# Altium PCB LASERDIODE_V1.2.0.PcbDoc (part 2 of 2)
Units mm, origin at the board's own origin, x right, y up, seen from the top; angles counter-clockwise.
Board outline 86 x 86 mm, 4 copper layers (Top Layer, Mid-Layer 1, Mid-Layer 2, Bottom Layer); 190 components, 97 nets, 948 pads, 583 vias.
Unrouted connection lines stored in the file: 478.
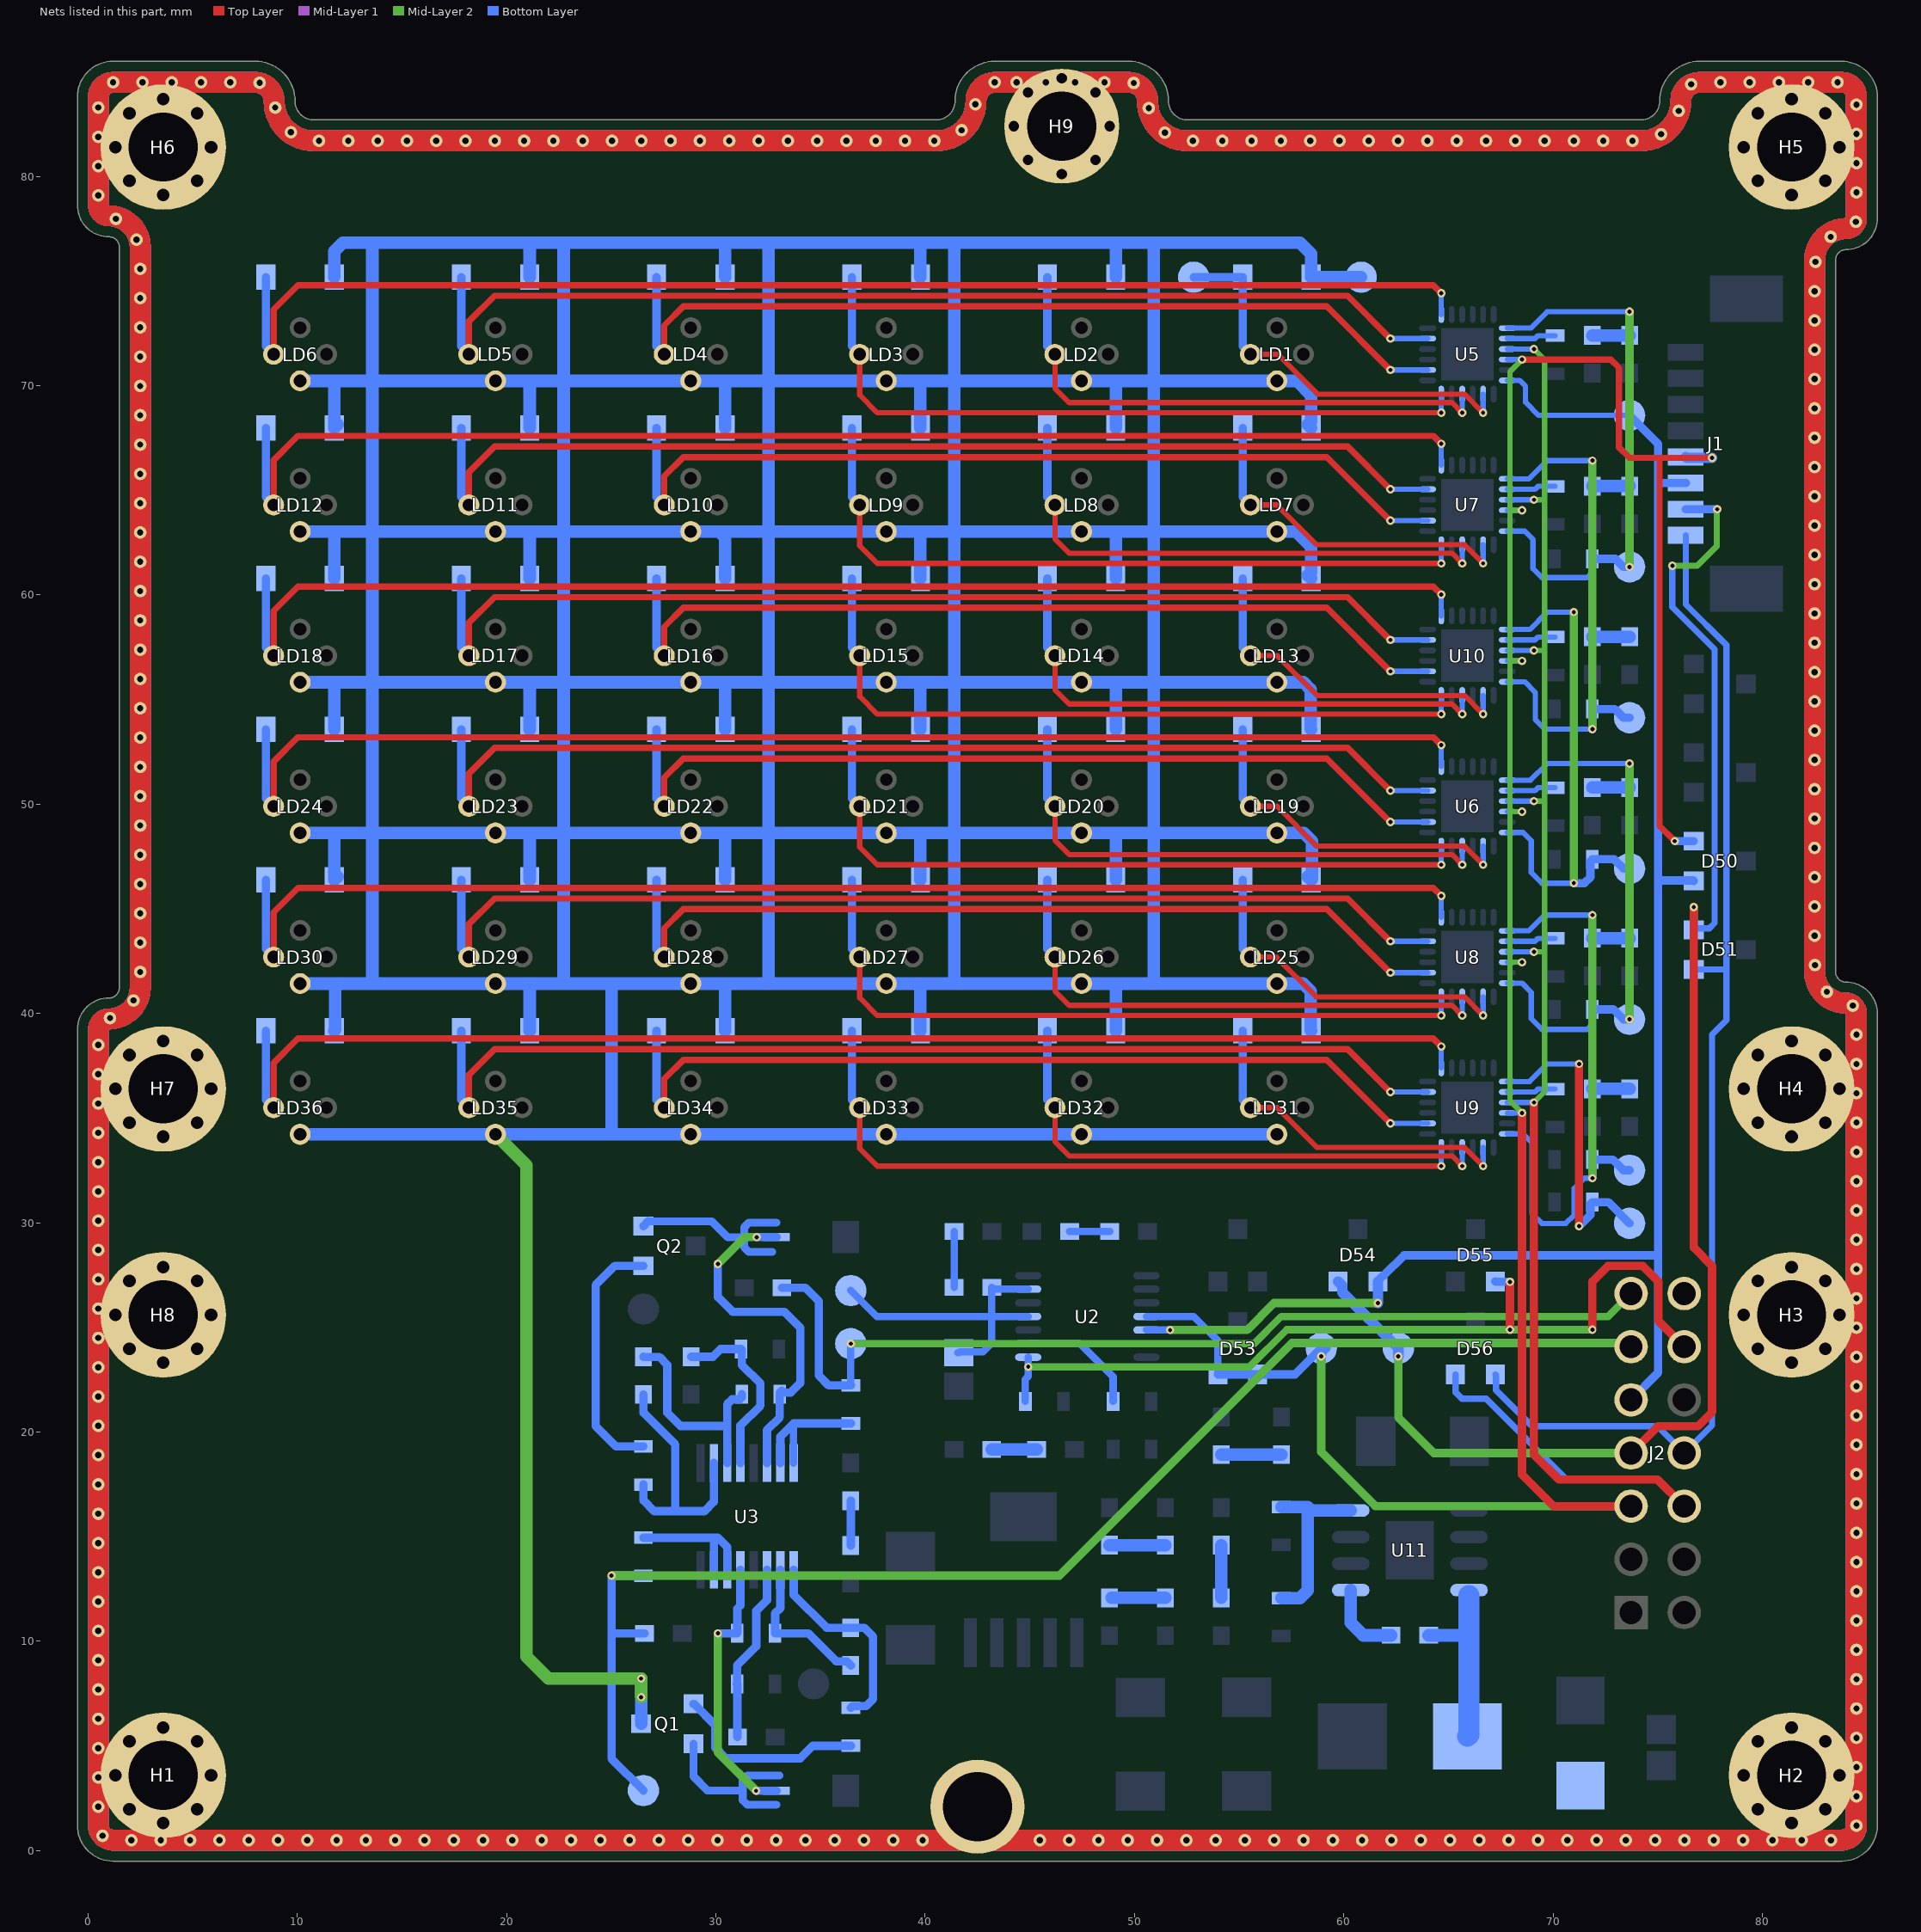
[diagram p4: the nets of this part, all layers, seen from the top]

## Via types
v1: diameter 0.4, hole 0.2, Top Layer to Bottom Layer, tented both sides, 583 vias

## Nets (pads, with @x,y where several pads share a name; then routed paths per layer and width w, separated by ;. In a path a pad name is that pad's centre, name@x,y a point inside that pad or via, vN(x,y) a via of type N, cw(c..) or ccw(c..) an arc to the next point about the centre after c; other vN are vias at no path point) (continued)
I_LD_INT: D1.1 D2.1 D3.1 D4.1 D5.1 D6.1 D7.1 D8.1 D9.1 D10.1 D11.1 D12.1 D13.1 D14.1 D15.1 D16.1 D17.1 D18.1 D19.1 D20.1 D21.1 D22.1 D23.1 D24.1 D25.1 D26.1 D27.1 D28.1 D29.1 D30.1 D31.1 D32.1 D34.1 D35.1 D38.1 D40.1 LD1.2 LD2.2 LD3.2 LD4.2 LD5.2 LD6.2 LD7.2 LD8.2 LD9.2 LD10.2 LD11.2 LD12.2 LD13.2 LD14.2 LD15.2 LD16.2 LD17.2 LD18.2 LD19.2 LD20.2 LD21.2 LD22.2 LD23.2 LD24.2 LD25.2 LD26.2 LD27.2 LD28.2 LD29.2 LD30.2 LD31.2 LD32.2 LD33.2 LD34.2 LD35.2 LD36.2 Q1.3 TP13.1 | length 631
  Mid-Layer 2 w0.6: LD35.2@19.474,34.23 20.955,32.749 20.955,9.271 22.003,8.223 v1(26.435,8.223) v1(26.435,7.334)
  Bottom Layer w0.6: LD36.2@10.14,34.23 LD35.2@19.474,34.23 25.019,34.23 ; LD30.2@10.14,41.43 13.589,41.43 ; LD24.2@10.14,48.63 11.865,48.63 ; LD18.2@10.14,55.83 13.589,55.83 ; LD12.2@10.14,63.03 13.589,63.03 ; LD6.2@10.14,70.23 11.865,70.23 ; D40.1@11.775,39.184 11.811,39.22 11.811,41.43 ; D23.1@11.775,53.584 11.775,55.579 ; D19.1@11.775,60.784 11.775,62.944 ; D3.1@11.775,75.184 11.775,76.418 12.192,76.835 13.589,76.835 ; D28.1@11.93,46.539 D28.1@11.775,46.384 11.775,48.54 11.865,48.63 ; D16.1@11.93,68.139 D16.1@11.775,67.984 11.775,70.14 11.865,70.23 ; D38.1@21.109,39.184 21.109,41.344 ; D25.1@21.109,46.384 21.109,48.63 ; D21.1@21.109,53.584 21.109,55.579 ; D18.1@21.109,60.784 21.109,62.996 ; D14.1@21.109,67.984 21.109,70.224 21.104,70.23 ; D5.1@21.109,75.184 21.109,76.808 21.082,76.835 ; 25.019,41.43 25.019,34.23 ; Q1.3@26.435,6.064 v1(26.435,7.334) v1(26.435,8.223) ; 30.164,63.03 30.443,62.751 D15.1@30.443,60.784 ; D35.1@30.443,39.184 30.443,41.316 ; D32.1@30.443,46.384 30.443,48.63 ; D20.1@30.443,53.584 30.443,55.579 ; D12.1@30.443,67.984 30.443,70.2 30.413,70.23 ; D8.1@30.443,75.184 30.443,76.798 30.48,76.835 ; 32.512,69.304 32.512,63.03 ; 32.512,69.309 32.512,70.23 ; D34.1@39.777,39.184 39.777,41.43 ; D30.1@39.777,46.384 39.777,48.63 ; D17.1@39.777,53.584 39.777,55.716 39.663,55.83 ; D13.1@39.777,60.784 39.777,62.944 ; D10.1@39.777,67.984 39.777,70.196 ; D6.1@39.777,75.184 39.777,76.809 39.751,76.835 ; D31.1@49.111,39.184 49.111,41.344 ; D27.1@49.111,46.384 49.111,48.379 ; D24.1@49.111,53.584 49.111,55.744 ; D11.1@49.111,60.784 49.111,62.996 49.145,63.03 ; D7.1@49.111,67.984 49.111,70.139 49.201,70.23 ; D4.1@49.111,75.184 49.111,76.797 49.149,76.835 ; LD31.2@56.81,34.23 LD32.2@47.476,34.23 LD33.2@38.142,34.23 LD34.2@28.808,34.23 25.019,34.23 ; D26.1@58.29,46.539 D26.1@58.445,46.384 58.479,46.418 58.479,48.237 58.086,48.63 LD19.2@56.81,48.63 50.927,48.63 ; D29.1@58.445,39.184 58.42,39.209 58.42,41.069 58.059,41.43 LD25.2@56.81,41.43 50.927,41.43 ; D22.1@58.445,53.584 58.42,53.609 58.42,55.479 58.069,55.83 LD13.2@56.81,55.83 50.927,55.83 ; D9.1@58.445,60.784 58.29,60.939 58.445,61.094 58.445,62.303 57.718,63.03 LD7.2@56.81,63.03 50.927,63.03 ; D2.1@58.445,67.984 58.29,68.139 58.445,68.294 58.445,69.541 57.756,70.23 LD1.2@56.81,70.23 50.927,70.23 ; TP13.1@60.833,75.184 D1.1@58.445,75.184 58.445,76.302 57.912,76.835 50.927,76.835 ; 11.865,48.63 13.589,48.63 ; 11.865,70.23 13.589,70.23 ; 13.589,41.43 13.589,48.63 ; 13.589,41.43 LD29.2@19.474,41.43 22.733,41.43 ; 13.589,48.63 13.589,55.83 ; 13.589,48.63 LD23.2@19.474,48.63 22.733,48.63 ; 13.589,55.83 LD17.2@19.474,55.83 22.733,55.83 ; 13.589,55.83 13.589,63.03 ; 13.589,63.03 LD11.2@19.474,63.03 22.733,63.03 ; 13.589,63.03 13.589,70.23 ; 13.589,70.23 13.589,76.835 ; 13.589,70.23 LD5.2@19.474,70.23 21.104,70.23 ; 13.589,76.835 21.082,76.835 ; 21.082,76.835 22.733,76.835 ; 21.104,70.23 22.733,70.23 ; 22.733,41.43 22.733,48.63 ; 22.733,41.43 LD28.2@28.808,41.43 32.512,41.43 ; 22.733,48.63 22.733,55.83 ; 22.733,48.63 LD22.2@28.808,48.63 32.512,48.63 ; 22.733,55.83 22.733,63.03 ; 22.733,55.83 LD16.2@28.808,55.83 32.512,55.83 ; 22.733,63.03 22.733,70.23 ; 22.733,63.03 LD10.2@28.808,63.03 32.512,63.03 ; 22.733,70.23 22.733,76.835 ; 22.733,70.23 LD4.2@28.808,70.23 30.413,70.23 ; 22.733,76.835 30.48,76.835 ; 30.413,70.23 32.512,70.23 ; 30.48,76.835 32.512,76.835 ; 32.512,41.43 32.512,48.63 ; 32.512,41.43 LD27.2@38.142,41.43 41.402,41.43 ; 32.512,48.63 32.512,55.83 ; 32.512,48.63 LD21.2@38.142,48.63 41.402,48.63 ; 32.512,55.83 32.512,63.03 ; 32.512,55.83 LD15.2@38.142,55.83 39.663,55.83 ; 32.512,63.03 LD9.2@38.142,63.03 41.402,63.03 ; 32.512,70.23 32.512,76.835 ; 32.512,70.23 LD3.2@38.142,70.23 41.402,70.23 ; 32.512,76.835 39.751,76.835 ; 39.663,55.83 41.402,55.83 ; 39.751,76.835 41.402,76.835 ; 41.402,41.43 41.402,48.63 ; 41.402,41.43 LD26.2@47.476,41.43 50.927,41.43 ; 41.402,48.63 41.402,55.83 ; 41.402,48.63 LD20.2@47.476,48.63 50.927,48.63 ; 41.402,55.83 41.402,63.03 ; 41.402,55.83 LD14.2@47.476,55.83 50.927,55.83 ; 41.402,63.03 41.402,70.23 ; 41.402,63.03 LD8.2@47.476,63.03 50.927,63.03 ; 41.402,70.23 41.402,76.835 ; 41.402,70.23 LD2.2@47.476,70.23 49.201,70.23 ; 41.402,76.835 49.149,76.835 ; 49.149,76.835 50.927,76.835 ; 49.201,70.23 50.927,70.23 ; 50.927,41.43 50.927,48.63 ; 50.927,48.63 50.927,55.83 ; 50.927,55.83 50.927,63.03 ; 50.927,63.03 50.927,70.23 ; 50.927,70.23 50.927,76.835
I_MO_EXT: C20.2 J2.7 R13.2 TP12.1 | length 47.6
  Mid-Layer 2 w0.35: v1(36.449,24.225) 55.721,24.225 57.023,25.527 72.637,25.527 J2.7@73.73,26.62
  Bottom Layer w0.35: R13.2@36.449,22.231 v1(36.449,24.225)
  Bottom Layer w0.4: C20.2@33.158,26.892 34.29,26.892 34.925,26.257 34.925,22.701 35.395,22.231 R13.2@36.449,22.231
I_MO_INT: C15.2 J2.6 R8.2 TP11.1 | length 67.3
  Mid-Layer 2 w0.4: v1(25.019,13.138) 46.412,13.138 57.531,24.257 73.553,24.257 J2.6@73.73,24.08
  Bottom Layer w0.4: TP11.1@26.543,2.872 25.019,4.396 25.019,10.382 ; R8.2@26.543,13.138 25.108,13.138 25.019,13.049 25.019,10.382 ; C15.2@26.596,10.382 25.019,10.382
LATCH: D55.1 J2.9 R25.2 U2.8 | length 42.6
  Top Layer w0.4: v1(67.945,24.892) v1(67.945,27.178) ; v1(71.882,24.892) 71.882,27.198 72.624,27.94 74.295,27.94 75.037,27.198 75.037,25.313 J2.9@76.27,24.08
  Mid-Layer 2 w0.35: v1(44.927,23.12) 55.505,23.12 57.277,24.892 v1(67.945,24.892) v1(71.882,24.892)
  Bottom Layer w0.35: R25.2@44.793,21.463 44.793,22.528 44.927,22.662 v1(44.927,23.12) U2.8@44.927,23.577
  Bottom Layer w0.4: D55.1@67.244,27.198 67.264,27.178 v1(67.945,27.178)
MISO_LD: D51.3 D54.3 J1.7 J2.4 TP5.1 | length 74.6
  Top Layer w0.4: J2.4@73.73,19 75.007,20.277 76.919,20.277 77.597,20.955 77.597,27.94 76.728,28.809 v1(76.728,45.085)
  Mid-Layer 2 w0.3: v1(75.704,61.398) 76.892,61.398 77.826,62.332 77.826,64.076 v1(77.845,64.096)
  Mid-Layer 2 w0.4: v1(62.611,23.622) 62.611,20.701 64.312,19 J2.4@73.73,19
  Bottom Layer w0.3: v1(75.704,61.398) 75.704,59.424 77.724,57.404 77.724,44.323 77.47,44.069 76.794,44.069 D51.3@76.728,44.003
  Bottom Layer w0.4: J1.7@76.343,64.098 76.346,64.096 v1(77.845,64.096) ; D51.3@76.728,44.003 v1(76.728,45.085)
  Bottom Layer w0.5: D54.3@59.732,27.198 59.932,26.998 59.932,26.682 TP5.1@62.611,24.003 v1(62.611,23.622)
MOSI_LD: D50.1 D54.1 J1.6 J2.5 TP6.1 U2.5 U5.24 | length 84.7
  Mid-Layer 2 w0.4: v1(51.704,24.877) 55.387,24.877 56.672,26.162 v1(61.632,26.162)
  Bottom Layer w0.254: U5.24@67.815,70.25 68.402,70.25 68.687,69.965 68.687,69.205 69.313,68.58 TP6.1@73.66,68.58
  Bottom Layer w0.35: U2.5@50.577,24.877 v1(51.704,24.877)
  Bottom Layer w0.4: D54.1@61.632,27.198 61.632,27.223 61.882,27.473 61.907,27.473 62.882,28.448 75.017,28.448 ; TP6.1@73.66,68.58 75.017,67.223 75.017,65.258 ; J2.5@73.73,21.54 75.017,22.827 75.017,28.448 ; J1.6@76.343,65.348 75.107,65.348 75.017,65.258 ; D50.1@76.728,46.336 76.709,46.355 75.017,46.355 ; 75.017,28.448 75.017,46.355 ; 75.017,46.355 75.017,65.258
  Bottom Layer w0.5: v1(61.632,26.162) D54.1@61.632,27.198
NetC1_1: C1.1 C5.2 | length 2.7
  Bottom Layer w0.6: C1.1@48.819,14.594 C5.2@51.486,14.594
NetC2_1: C2.1 C6.2 | length 2.6
  Bottom Layer w0.6: C6.2@48.919,12.076 C2.1@51.486,12.076
NetC7_1: C7.1 C8.2 | length 1.9
  Bottom Layer w0.35: C8.2@46.905,29.589 C7.1@48.82,29.589
NetC9_1: C9.1 C11.2 | length 2.7
  Bottom Layer w0.35: C9.1@41.391,26.924 C11.2@41.391,29.589
NetC10_1: C10.1 C12.2 | length 2.1
  Bottom Layer w0.6: C10.1@43.18,19.177 C12.2@45.328,19.177
NetC13_2: C13.2 R5.2 U3.3 | length 8.6
  Bottom Layer w0.4: C13.2@31.04,5.429 31.026,5.442 31.026,7.956 R5.2@31.013,7.969 31.019,7.975 31.019,8.849 31.934,9.764 31.934,11.455 32.449,11.97 U3.3@32.449,13.417
NetC14_1: C14.1 R7.1 U3.2 | length 7.4
  Bottom Layer w0.4: R7.1@32.829,10.382 34.417,10.382 35.751,9.048 36.249,9.048 C14.1@36.449,8.847 ; R7.1@32.842,10.396 32.842,11.347 33.084,11.589 U3.2@33.084,13.417
NetC14_2: C14.2 R6.1 U3.1 | length 10
  Bottom Layer w0.4: U3.1@33.719,13.417 33.719,12.224 35.295,10.647 C14.2@36.449,10.647 37.092,10.647 37.515,10.224 37.515,7.249 37.17,6.904 36.528,6.904 R6.1@36.45,6.826
NetC16_1: C16.1 C17.2 | length 2.1
  Bottom Layer w0.4: C16.1@36.449,14.584 C17.2@36.449,16.721
NetC18_2: C18.2 R10.2 U3.12 | length 8.8
  Bottom Layer w0.4: C18.2@28.829,23.601 29.856,23.601 30.226,23.971 R10.2@31.204,23.971 31.242,23.933 31.242,23.209 32.131,22.32 32.131,21.264 31.179,20.312 U3.12@31.179,18.523
NetC19_1: C19.1 R12.1 U3.11 | length 10.5
  Bottom Layer w0.4: C19.1@26.543,23.601 26.554,23.59 27.305,23.59 27.686,23.209 27.686,20.923 28.321,20.288 30.544,20.288 ; U3.11@30.544,18.523 30.544,20.288 ; R12.1@31.242,21.812 31.242,21.662 31.142,21.562 30.778,21.562 30.544,21.328 30.544,20.288
NetC19_2: C19.2 R11.1 U3.10 | length 12.6
  Bottom Layer w0.4: R11.1@26.543,17.494 26.543,16.732 27.051,16.224 28.067,16.224 ; C19.2@26.543,21.801 26.543,20.923 28.067,19.399 28.067,16.224 ; U3.10@29.909,18.523 29.909,16.669 29.464,16.224 28.067,16.224
NetC23_1: C23.1 C24.2 | length 1.8
  Bottom Layer w0.6: C23.1@71.882,72.4 C24.2@73.66,72.4
NetC25_1: C25.1 C26.2 | length 1.8
  Bottom Layer w0.6: C25.1@71.882,65.2 C26.2@73.66,65.2
NetC27_1: C27.1 C28.2 | length 1.8
  Bottom Layer w0.6: C27.1@71.882,58 C28.2@73.66,58
NetC29_1: C29.1 C30.2 | length 1.8
  Bottom Layer w0.6: C29.1@71.882,50.8 C30.2@73.66,50.8
NetC31_1: C31.1 C32.2 | length 1.8
  Bottom Layer w0.6: C31.1@71.882,43.6 C32.2@73.66,43.6
NetC33_1: C33.1 C34.2 | length 1.8
  Bottom Layer w0.6: C33.1@71.882,36.4 C34.2@73.66,36.4
NetC35_1: C35.1 D58.2 L2.1 U11.8 | length 8.7
  Bottom Layer w0.6: C35.1@64.063,10.287 65.861,10.287 65.988,10.414
  Bottom Layer w1: L2.1@65.913,5.461 65.988,5.536 65.988,10.414 U11.8@65.988,12.192
NetC35_2: C35.2 U11.1 | length 3.7
  Bottom Layer w0.6: U11.1@60.338,12.446 60.338,10.887 60.938,10.287 C35.2@62.263,10.287
NetC36_1: C36.1 C40.2 | length 2.9
  Bottom Layer w0.6: C40.2@54.153,18.925 C36.1@57.023,18.925
NetC37_1: C37.1 C41.2 | length 2.5
  Bottom Layer w0.6: C37.1@54.153,12.076 C41.2@54.153,14.594
NetD1_2: D1.2 LD1.1 TP14.1 U5.2 | length 19.3
  Top Layer w0.254: LD1.1@55.54,71.5 56.858,71.5 58.762,69.596 65.774,69.596 v1(66.663,68.707)
  Bottom Layer w0.254: v1(66.663,68.707) U5.2@66.663,69.598
  Bottom Layer w0.4: TP14.1@52.832,75.184 D1.2@55.175,75.184 55.175,71.884 55.54,71.519 LD1.1@55.54,71.5
NetD2_2: D2.2 LD7.1 U7.2 | length 17
  Top Layer w0.254: LD7.1@55.54,64.3 56.805,64.3 58.709,62.396 65.774,62.396 v1(66.663,61.507)
  Bottom Layer w0.254: v1(66.663,61.507) U7.2@66.663,62.398
  Bottom Layer w0.4: D2.2@55.175,67.984 55.175,64.684 55.54,64.319 LD7.1@55.54,64.3
NetD3_2: D3.2 LD6.1 U5.13 | length 63.4
  Top Layer w0.3: LD6.1@8.87,71.5 8.87,73.64 10.033,74.803 64.282,74.803 v1(64.663,74.422)
  Bottom Layer w0.254: U5.13@64.663,73.402 v1(64.663,74.422)
  Bottom Layer w0.4: D3.2@8.505,75.184 8.505,71.884 8.87,71.519 LD6.1@8.87,71.5
NetD4_2: D4.2 LD2.1 U5.4 | length 26.3
  Top Layer w0.254: LD2.1@46.206,71.5 46.206,69.872 46.886,69.192 65.178,69.192 v1(65.663,68.707)
  Bottom Layer w0.254: v1(65.663,68.707) U5.4@65.663,69.598
  Bottom Layer w0.4: D4.2@45.841,75.184 45.841,71.884 46.206,71.519 LD2.1@46.206,71.5
NetD5_2: D5.2 LD5.1 U5.11 | length 52.6
  Top Layer w0.3: LD5.1@18.204,71.5 18.204,73.068 19.431,74.295 60.185,74.295 v1(62.23,72.25)
  Bottom Layer w0.254: v1(62.23,72.25) U5.11@64.011,72.25
  Bottom Layer w0.4: D5.2@17.839,75.184 17.839,71.884 18.204,71.519 LD5.1@18.204,71.5
NetD6_2: D6.2 LD3.1 U5.6 | length 34.8
  Top Layer w0.254: LD3.1@36.872,71.5 36.872,69.554 37.719,68.707 v1(64.663,68.707)
  Bottom Layer w0.254: v1(64.663,68.707) U5.6@64.663,69.598
  Bottom Layer w0.4: D6.2@36.507,75.184 36.507,71.884 36.872,71.519 LD3.1@36.872,71.5
NetD7_2: D7.2 LD8.1 U7.4 | length 26.3
  Top Layer w0.254: LD8.1@46.206,64.3 46.206,62.672 46.886,61.992 65.178,61.992 v1(65.663,61.507)
  Bottom Layer w0.254: v1(65.663,61.507) U7.4@65.663,62.398
  Bottom Layer w0.4: D7.2@45.841,67.984 45.841,64.684 46.206,64.319 LD8.1@46.206,64.3
NetD8_2: D8.2 LD4.1 U5.8 | length 43.3
  Top Layer w0.3: LD4.1@27.538,71.5 27.538,72.877 28.448,73.787 59.193,73.787 v1(62.23,70.75)
  Bottom Layer w0.254: v1(62.23,70.75) U5.8@64.011,70.75
  Bottom Layer w0.4: D8.2@27.173,75.184 27.173,71.884 27.538,71.519 LD4.1@27.538,71.5
NetD9_2: D9.2 LD13.1 U10.2 | length 17
  Top Layer w0.254: LD13.1@55.54,57.1 56.819,57.1 58.723,55.196 65.774,55.196 v1(66.663,54.307)
  Bottom Layer w0.254: v1(66.663,54.307) U10.2@66.663,55.198
  Bottom Layer w0.4: D9.2@55.175,60.784 55.175,57.484 55.54,57.119 LD13.1@55.54,57.1
NetD10_2: D10.2 LD9.1 U7.6 | length 34.8
  Top Layer w0.254: LD9.1@36.872,64.3 36.872,62.354 37.719,61.507 v1(64.663,61.507)
  Bottom Layer w0.254: v1(64.663,61.507) U7.6@64.663,62.398
  Bottom Layer w0.4: D10.2@36.507,67.984 36.507,64.684 36.872,64.319 LD9.1@36.872,64.3
NetD11_2: D11.2 LD14.1 U10.4 | length 26.3
  Top Layer w0.254: LD14.1@46.206,57.1 46.206,55.472 46.886,54.792 65.178,54.792 v1(65.663,54.307)
  Bottom Layer w0.254: v1(65.663,54.307) U10.4@65.663,55.198
  Bottom Layer w0.4: D11.2@45.841,60.784 45.841,57.484 46.206,57.119 LD14.1@46.206,57.1
NetD12_2: D12.2 LD10.1 U7.8 | length 43.3
  Top Layer w0.3: LD10.1@27.538,64.3 27.538,65.677 28.448,66.587 59.193,66.587 v1(62.23,63.55)
  Bottom Layer w0.254: v1(62.23,63.55) U7.8@64.011,63.55
  Bottom Layer w0.4: D12.2@27.173,67.984 27.173,64.684 27.538,64.319 LD10.1@27.538,64.3
NetD13_2: D13.2 LD15.1 U10.6 | length 34.8
  Top Layer w0.254: LD15.1@36.872,57.1 36.872,55.154 37.719,54.307 v1(64.663,54.307)
  Bottom Layer w0.254: v1(64.663,54.307) U10.6@64.663,55.198
  Bottom Layer w0.4: D13.2@36.507,60.784 36.507,57.484 36.872,57.119 LD15.1@36.872,57.1
NetD14_2: D14.2 LD11.1 U7.11 | length 52.6
  Top Layer w0.3: LD11.1@18.204,64.3 18.204,65.868 19.431,67.095 60.185,67.095 v1(62.23,65.05)
  Bottom Layer w0.254: v1(62.23,65.05) U7.11@64.011,65.05
  Bottom Layer w0.4: D14.2@17.839,67.984 17.839,64.684 18.204,64.319 LD11.1@18.204,64.3
NetD15_2: D15.2 LD16.1 U10.8 | length 43.3
  Top Layer w0.3: LD16.1@27.538,57.1 27.538,58.477 28.448,59.387 59.193,59.387 v1(62.23,56.35)
  Bottom Layer w0.254: v1(62.23,56.35) U10.8@64.011,56.35
  Bottom Layer w0.4: D15.2@27.173,60.784 27.173,57.484 27.538,57.119 LD16.1@27.538,57.1
NetD16_2: D16.2 LD12.1 U7.13 | length 63.4
  Top Layer w0.3: LD12.1@8.87,64.3 8.87,66.44 10.033,67.603 64.282,67.603 v1(64.663,67.222)
  Bottom Layer w0.254: U7.13@64.663,66.202 v1(64.663,67.222)
  Bottom Layer w0.4: D16.2@8.505,67.984 8.505,64.684 8.87,64.319 LD12.1@8.87,64.3
NetD17_2: D17.2 LD21.1 U6.6 | length 34.8
  Top Layer w0.254: LD21.1@36.872,49.9 36.872,47.954 37.719,47.107 v1(64.663,47.107)
  Bottom Layer w0.254: v1(64.663,47.107) U6.6@64.663,47.998
  Bottom Layer w0.4: D17.2@36.507,53.584 36.507,50.284 36.872,49.919 LD21.1@36.872,49.9
NetD18_2: D18.2 LD17.1 U10.11 | length 52.6
  Top Layer w0.3: LD17.1@18.204,57.1 18.204,58.668 19.431,59.895 60.185,59.895 v1(62.23,57.85)
  Bottom Layer w0.254: v1(62.23,57.85) U10.11@64.011,57.85
  Bottom Layer w0.4: D18.2@17.839,60.784 17.839,57.484 18.204,57.119 LD17.1@18.204,57.1
NetD19_2: D19.2 LD18.1 U10.13 | length 63.4
  Top Layer w0.3: LD18.1@8.87,57.1 8.87,59.24 10.033,60.403 64.282,60.403 v1(64.663,60.022)
  Bottom Layer w0.254: U10.13@64.663,59.002 v1(64.663,60.022)
  Bottom Layer w0.4: D19.2@8.505,60.784 8.505,57.484 8.87,57.119 LD18.1@8.87,57.1
NetD20_2: D20.2 LD22.1 U6.8 | length 43.3
  Top Layer w0.3: LD22.1@27.538,49.9 27.538,51.277 28.448,52.187 59.193,52.187 v1(62.23,49.15)
  Bottom Layer w0.254: v1(62.23,49.15) U6.8@64.011,49.15
  Bottom Layer w0.4: D20.2@27.173,53.584 27.173,50.284 27.538,49.919 LD22.1@27.538,49.9
NetD21_2: D21.2 LD23.1 U6.11 | length 52.6
  Top Layer w0.3: LD23.1@18.204,49.9 18.204,51.468 19.431,52.695 60.185,52.695 v1(62.23,50.65)
  Bottom Layer w0.254: v1(62.23,50.65) U6.11@64.011,50.65
  Bottom Layer w0.4: D21.2@17.839,53.584 17.839,50.284 18.204,49.919 LD23.1@18.204,49.9
NetD22_2: D22.2 LD19.1 U6.2 | length 17
  Top Layer w0.254: LD19.1@55.54,49.9 56.816,49.9 58.72,47.996 65.774,47.996 v1(66.663,47.107)
  Bottom Layer w0.254: v1(66.663,47.107) U6.2@66.663,47.998
  Bottom Layer w0.4: D22.2@55.175,53.584 55.175,50.284 55.54,49.919 LD19.1@55.54,49.9
NetD23_2: D23.2 LD24.1 U6.13 | length 63.4
  Top Layer w0.3: LD24.1@8.87,49.9 8.87,52.04 10.033,53.203 64.282,53.203 v1(64.663,52.822)
  Bottom Layer w0.254: U6.13@64.663,51.802 v1(64.663,52.822)
  Bottom Layer w0.4: D23.2@8.505,53.584 8.505,50.284 8.87,49.919 LD24.1@8.87,49.9
NetD24_2: D24.2 LD20.1 U6.4 | length 26.3
  Top Layer w0.254: LD20.1@46.206,49.9 46.206,48.272 46.886,47.592 65.178,47.592 v1(65.663,47.107)
  Bottom Layer w0.254: v1(65.663,47.107) U6.4@65.663,47.998
  Bottom Layer w0.4: D24.2@45.841,53.584 45.841,50.284 46.206,49.919 LD20.1@46.206,49.9
NetD25_2: D25.2 LD29.1 U8.11 | length 52.6
  Top Layer w0.3: LD29.1@18.204,42.7 18.204,44.268 19.431,45.495 60.185,45.495 v1(62.23,43.45)
  Bottom Layer w0.254: v1(62.23,43.45) U8.11@64.011,43.45
  Bottom Layer w0.4: D25.2@17.839,46.384 17.839,43.084 18.204,42.719 LD29.1@18.204,42.7
NetD26_2: D26.2 LD25.1 U8.2 | length 17
  Top Layer w0.254: LD25.1@55.54,42.7 56.789,42.7 58.693,40.796 65.774,40.796 v1(66.663,39.907)
  Bottom Layer w0.254: v1(66.663,39.907) U8.2@66.663,40.798
  Bottom Layer w0.4: D26.2@55.175,46.384 55.175,43.084 55.54,42.719 LD25.1@55.54,42.7
NetD27_2: D27.2 LD26.1 U8.4 | length 26.3
  Top Layer w0.254: LD26.1@46.206,42.7 46.206,41.072 46.886,40.392 65.178,40.392 v1(65.663,39.907)
  Bottom Layer w0.254: v1(65.663,39.907) U8.4@65.663,40.798
  Bottom Layer w0.4: D27.2@45.841,46.384 45.841,43.084 46.206,42.719 LD26.1@46.206,42.7
NetD28_2: D28.2 LD30.1 U8.13 | length 63.4
  Top Layer w0.3: LD30.1@8.87,42.7 8.87,44.84 10.033,46.003 64.282,46.003 v1(64.663,45.622)
  Bottom Layer w0.254: U8.13@64.663,44.602 v1(64.663,45.622)
  Bottom Layer w0.4: D28.2@8.505,46.384 8.505,43.084 8.87,42.719 LD30.1@8.87,42.7
NetD29_2: D29.2 LD31.1 U9.2 | length 17
  Top Layer w0.254: LD31.1@55.54,35.5 56.829,35.5 58.733,33.596 65.774,33.596 v1(66.663,32.707)
  Bottom Layer w0.254: v1(66.663,32.707) U9.2@66.663,33.598
  Bottom Layer w0.4: D29.2@55.175,39.184 55.175,35.884 55.54,35.519 LD31.1@55.54,35.5
NetD30_2: D30.2 LD27.1 U8.6 | length 34.8
  Top Layer w0.254: LD27.1@36.872,42.7 36.872,40.754 37.719,39.907 v1(64.663,39.907)
  Bottom Layer w0.254: v1(64.663,39.907) U8.6@64.663,40.798
  Bottom Layer w0.4: D30.2@36.507,46.384 36.507,43.084 36.872,42.719 LD27.1@36.872,42.7
NetD31_2: D31.2 LD32.1 U9.4 | length 26.3
  Top Layer w0.254: LD32.1@46.206,35.5 46.206,33.872 46.886,33.192 65.178,33.192 v1(65.663,32.707)
  Bottom Layer w0.254: v1(65.663,32.707) U9.4@65.663,33.598
  Bottom Layer w0.4: D31.2@45.841,39.184 45.841,35.884 46.206,35.519 LD32.1@46.206,35.5
NetD32_2: D32.2 LD28.1 U8.8 | length 43.3
  Top Layer w0.3: LD28.1@27.538,42.7 27.538,44.077 28.448,44.987 59.193,44.987 v1(62.23,41.95)
  Bottom Layer w0.254: v1(62.23,41.95) U8.8@64.011,41.95
  Bottom Layer w0.4: D32.2@27.173,46.384 27.173,43.084 27.538,42.719 LD28.1@27.538,42.7
NetD34_2: D34.2 LD33.1 U9.6 | length 34.8
  Top Layer w0.254: LD33.1@36.872,35.5 36.872,33.554 37.719,32.707 v1(64.663,32.707)
  Bottom Layer w0.254: v1(64.663,32.707) U9.6@64.663,33.598
  Bottom Layer w0.4: D34.2@36.507,39.184 36.507,35.884 36.872,35.519 LD33.1@36.872,35.5
NetD35_2: D35.2 LD34.1 U9.8 | length 43.3
  Top Layer w0.3: LD34.1@27.538,35.5 27.538,36.877 28.448,37.787 59.193,37.787 v1(62.23,34.75)
  Bottom Layer w0.254: v1(62.23,34.75) U9.8@64.011,34.75
  Bottom Layer w0.4: D35.2@27.173,39.184 27.173,35.884 27.538,35.519 LD34.1@27.538,35.5
NetD38_2: D38.2 LD35.1 U9.11 | length 52.6
  Top Layer w0.3: LD35.1@18.204,35.5 18.204,37.068 19.431,38.295 60.185,38.295 v1(62.23,36.25)
  Bottom Layer w0.254: v1(62.23,36.25) U9.11@64.011,36.25
  Bottom Layer w0.4: D38.2@17.839,39.184 17.839,35.884 18.204,35.519 LD35.1@18.204,35.5
NetD40_2: D40.2 LD36.1 U9.13 | length 63.4
  Top Layer w0.3: LD36.1@8.87,35.5 8.87,37.64 10.033,38.803 64.282,38.803 v1(64.663,38.422)
  Bottom Layer w0.254: U9.13@64.663,37.402 v1(64.663,38.422)
  Bottom Layer w0.4: D40.2@8.505,39.184 8.505,35.884 8.87,35.519 LD36.1@8.87,35.5
NetQ1_1: Q1.1 R6.2 | length 9.5
  Bottom Layer w0.4: Q1.1@28.935,7.014 28.96,7.014 29.972,6.002 29.972,4.921 30.48,4.413 34.036,4.413 34.633,5.01 R6.2@36.45,5.01
NetQ1_2: Q1.2 R7.2 R9.2 U3.5 | length 22
  Mid-Layer 2 w0.4: v1(30.099,10.382) 30.099,4.686 v1(31.925,2.86)
  Bottom Layer w0.38: Q1.2@28.935,5.114 28.935,3.545 29.608,2.872 31.286,2.872 ; 32.893,2.191 31.509,2.191 31.286,2.413 31.286,2.872 ; 33.044,3.587 32.336,3.587 31.509,3.586 31.286,3.364 31.286,2.872
  Bottom Layer w0.4: v1(30.099,10.382) R7.2@31.013,10.382 ; R7.2@31.026,10.396 31.026,11.563 31.179,11.716 U3.5@31.179,13.417 ; v1(31.925,2.86) R9.2@32.906,2.86
NetQ2_1: Q2.1 R11.2 | length 12.1
  Bottom Layer w0.4: R11.2@26.543,19.31 25.235,19.31 24.638,19.907 24.257,20.288 24.257,27.019 25.182,27.944 Q2.1@26.543,27.944
NetQ2_2: Q2.2 R12.2 R14.2 U3.14 | length 26.3
  Mid-Layer 2 w0.4: v1(30.099,28.035) 31.38,29.316 v1(31.955,29.316)
  Bottom Layer w0.38: Q2.2@26.766,30.067 29.813,30.067 30.574,29.306 31.358,29.306 ; 32.698,28.609 31.581,28.609 31.358,28.832 31.358,29.306 ; 32.893,30.004 31.581,30.004 31.358,29.781 31.358,29.306
  Bottom Layer w0.4: Q2.2@26.543,29.844 Q2.2@26.766,30.067 ; v1(30.099,28.035) 30.099,26.455 30.805,25.749 33.274,25.749 34.036,24.987 34.036,22.34 33.582,21.886 R12.2@33.058,21.886 ; v1@31.955,29.303 31.968,29.316 R14.2@32.905,29.316 ; U3.14@32.449,18.523 32.449,20.098 33.058,20.707 R12.2@33.058,21.886 ; R12.2@33.158,21.986 R12.2@33.058,21.886
NetR2_2: R2.2 U2.9 | length 5.9
  Bottom Layer w0.35: U2.9@44.927,24.227 47.401,24.227 48.984,22.644 R2.2@48.984,21.463
NetR8_1: R8.1 U3.6 U3.7 | length 6.8
  Bottom Layer w0.4: R8.1@26.543,14.954 29.845,14.954 ; U3.7@29.909,13.417 29.909,14.891 29.845,14.954 ; U3.6@30.544,13.417 30.544,14.51 30.099,14.954 29.845,14.954
NetR13_1: R13.1 U3.15 U3.16 | length 6.8
  Bottom Layer w0.35: U3.16@33.719,18.523 33.719,20.415
  Bottom Layer w0.4: U3.15@33.084,18.523 33.084,19.78 33.718,20.415 34.29,20.415 R13.1@36.449,20.415
NetR15_1: R15.1 U7.20 | length 2.3
  Bottom Layer w0.254: U7.20@67.815,65.05 69.14,65.05 69.28,65.19 R15.1@70.104,65.189
NetR16_1: R16.1 U10.20 | length 2.3
  Bottom Layer w0.254: U10.20@67.815,57.85 69.14,57.85 69.28,57.99 R16.1@70.103,57.99
NetR17_1: R17.1 U6.20 | length 2.3
  Bottom Layer w0.254: U6.20@67.815,50.65 69.14,50.65 69.28,50.79 R17.1@70.104,50.789
NetR18_1: R18.1 U8.20 | length 2.3
  Bottom Layer w0.254: U8.20@67.815,43.45 69.14,43.45 69.28,43.59 R18.1@70.104,43.589
NetR19_1: R19.1 U5.20 | length 2.3
  Bottom Layer w0.254: U5.20@67.815,72.25 69.14,72.25 69.28,72.39 R19.1@70.104,72.389
NetR26_1: R26.1 R27.2 U11.4 | length 8.8
  Bottom Layer w0.6: R26.1@57.023,12.065 57.912,12.065 58.286,12.439 58.286,16.421 ; R27.2@57.023,16.421 58.286,16.421 ; U11.4@60.338,16.256 58.451,16.256 58.286,16.421
NetR36_1: R36.1 U9.20 | length 2.3
  Bottom Layer w0.254: U9.20@67.815,36.25 69.14,36.25 69.28,36.39 R36.1@70.103,36.39
SCK_LD: D50.3 D53.1 D53.3 J1.5 J2.3 TP4.1 U2.4 U5.22 U6.22 U7.22 U8.22 U9.22 U10.22 | length 132
  Top Layer w0.3: v1(68.52,71.25) 72.768,71.25 73.152,70.866 73.152,67.056 73.66,66.548 75.097,66.548 ; v1(75.819,48.236) 75.097,48.958 75.097,66.548 ; v1(77.597,66.548) 75.097,66.548
  Top Layer w0.4: v1(68.52,35.25) 68.52,17.967 70.027,16.46 J2.3@73.73,16.46
  Mid-Layer 2 w0.254: v1(68.52,35.25) 67.945,35.825 67.945,42.418 ; v1(68.52,42.45) 67.977,42.45 67.945,42.418 ; v1(68.52,49.65) 67.952,49.65 67.945,49.657 ; v1(68.52,56.85) 67.945,56.85 ; v1(68.52,64.05) 67.945,64.05 ; v1(68.52,71.25) 67.945,70.675 67.945,64.05 ; 67.945,42.418 67.945,49.657 ; 67.945,49.657 67.945,56.85 ; 67.945,56.85 67.945,64.05
  Mid-Layer 2 w0.4: v1(58.928,23.622) 58.928,19.05 61.518,16.46 J2.3@73.73,16.46
  Bottom Layer w0.254: U9.22@67.815,35.25 v1(68.52,35.25) ; U8.22@67.815,42.45 v1(68.52,42.45) ; U6.22@67.815,49.65 v1(68.52,49.65) ; U10.22@67.815,56.85 v1(68.52,56.85) ; U7.22@67.815,64.05 v1(68.52,64.05) ; U5.22@67.815,71.25 v1(68.52,71.25)
  Bottom Layer w0.35: U2.4@50.577,25.527 52.832,25.527 53.993,24.366 D53.3@53.993,22.753
  Bottom Layer w0.4: D53.3@53.993,22.753 57.678,22.753 TP4.1@58.928,24.003 ; TP4.1@58.928,23.749 TP4.1@59.182,24.003 ; v1(75.819,48.236) D50.3@76.728,48.236
  Bottom Layer w0.5: J1.5@76.343,66.598 76.394,66.548 v1(77.597,66.548)
SDO_1: R20.1 TP16.1 U5.19 U7.24 | length 26.8
  Mid-Layer 2 w0.4: v1(73.66,61.341) v1(73.66,73.533)
  Bottom Layer w0.254: U7.24@67.815,63.05 68.649,63.05 69.045,62.654 69.045,61.257 69.469,60.833 71.628,60.833 71.882,61.087 R20.1@71.882,61.722 ; U5.19@67.815,72.75 68.94,72.75 69.723,73.533 v1(73.66,73.533)
  Bottom Layer w0.4: R20.1@71.882,61.722 72.981,61.722 73.362,61.341 v1(73.66,61.341)
SDO_2: R21.1 TP18.1 U7.19 U10.24 | length 25.9
  Mid-Layer 2 w0.4: v1(71.882,53.594) v1(71.882,66.421)
  Bottom Layer w0.254: U10.24@67.815,55.85 68.645,55.85 69.154,55.34 69.154,54.044 69.604,53.594 v1(71.882,53.594) ; U7.19@67.815,65.55 68.852,65.55 69.723,66.421 v1(71.882,66.421)
  Bottom Layer w0.4: v1(71.882,53.594) R21.1@71.882,54.546 72.95,54.546 73.362,54.134 TP18.1@73.66,54.134
SDO_3: R22.1 TP15.1 U6.24 U10.19 | length 25.3
  Mid-Layer 2 w0.4: v1(70.993,46.228) v1(70.993,59.182)
  Bottom Layer w0.254: U6.24@67.815,48.65 68.571,48.65 68.961,48.26 68.961,46.736 69.469,46.228 v1(70.993,46.228) ; U10.19@67.815,58.35 68.891,58.35 69.723,59.182 v1(70.993,59.182)
  Bottom Layer w0.4: v1(70.993,46.228) 71.501,46.228 71.782,46.509 71.782,47.271 R22.1@71.882,47.371 72.918,47.371 73.362,46.926 TP15.1@73.66,46.926
SDO_4: R23.1 TP17.1 U6.19 U8.24 | length 26.9
  Mid-Layer 2 w0.4: v1(73.66,39.719) v1(73.66,51.943)
  Bottom Layer w0.254: U8.24@67.815,41.45 68.52,41.45 68.961,41.009 68.961,39.751 69.469,39.243 71.628,39.243 71.882,39.497 R23.1@71.882,40.195 ; U6.19@67.815,51.15 68.93,51.15 69.723,51.943 v1(73.66,51.943)
  Bottom Layer w0.4: R23.1@71.882,40.195 72.886,40.195 73.362,39.719 v1(73.66,39.719)
SDO_5: R24.1 TP19.1 U8.19 U9.24 | length 29.3
  Mid-Layer 2 w0.4: v1(71.882,32.131) v1(71.882,44.704)
  Bottom Layer w0.254: U9.24@67.815,34.25 68.574,34.25 69.005,33.819 69.005,30.436 69.469,29.972 70.612,29.972 71.011,30.371 71.011,31.638 71.504,32.131 v1(71.882,32.131) ; U8.19@67.815,43.95 68.842,43.95 69.596,44.704 v1(71.882,44.704)
  Bottom Layer w0.4: v1(71.882,32.131) R24.1@71.882,33.02 72.854,33.02 73.362,32.512 TP19.1@73.66,32.512
SDO_6: R1.1 TP9.1 U9.19 | length 15.1
  Top Layer w0.4: v1(71.247,29.845) v1(71.247,37.592)
  Bottom Layer w0.254: U9.19@67.815,36.75 68.881,36.75 69.723,37.592 v1(71.247,37.592)
  Bottom Layer w0.4: v1(71.247,29.845) 71.782,30.38 71.782,30.888 R1.1@71.882,30.988 72.644,30.988 TP9.1@73.66,29.972
SHIELD: H1.1 H2.1 H3.1 H4.1 H5.1 H6.1 H7.1 H8.1 H9.1 J2.8 pad.1 | length 1382.7
  Top Layer w1: 0.504,1.199 ccw(c1.2,1.2) 1.199,0.504 ; 0.504,1.201 0.504,39.243 ; 0.504,39.244 cw(c1,39.243) 1,39.739 ccw(c1,41.243) 2.504,41.243 2.504,76.613 ccw(c1,76.613) 1,78.117 cw(c1,78.613) 0.504,78.613 0.504,83.8 cw(c1.2,83.8) pad.1@1.199,84.496 ; pad.1@1.2,84.496 pad.1@7.998,84.496 ; 1.202,0.504 83.799,0.504 ; pad.1@8.001,84.496 cw(c8,83.6) 8.896,83.601 ccw(c10.8,83.6) 10.8,81.696 40.53,81.696 ccw(c40.53,83.6) 42.434,83.6 cw(c43.33,83.6) 43.33,84.496 49.73,84.496 cw(c49.73,83.6) 50.626,83.601 ccw(c52.53,83.6) 52.53,81.696 74.2,81.696 ccw(c74.2,83.6) 76.104,83.6 cw(c77,83.6) 77,84.496 83.8,84.496 cw(c83.8,83.8) 84.496,83.8 pad.1@84.496,78.01 ; pad.1@82.496,75.99 82.496,42 ccw(c84,42) 84,40.496 cw(c84,40) 84.496,40 pad.1@84.496,1.202 ; pad.1@82.496,76.004 cw(c84,76) 83.997,77.504 ; 83.801,0.504 ccw(c83.8,1.2) pad.1@84.496,1.199 ; 84.001,77.504 ccw(c84,78) pad.1@84.496,77.997
  Mid-Layer 1 w1: 0.504,1.199 ccw(c1.2,1.2) 1.199,0.504 ; 0.504,1.201 0.504,39.243 ; 0.504,39.244 cw(c1,39.243) 1,39.739 ccw(c1,41.243) 2.504,41.243 2.504,76.613 ccw(c1,76.613) 1,78.117 cw(c1,78.613) 0.504,78.613 0.504,83.8 cw(c1.2,83.8) pad.1@1.199,84.496 ; pad.1@1.2,84.496 pad.1@7.998,84.496 ; 1.202,0.504 83.799,0.504 ; pad.1@8.001,84.496 cw(c8,83.6) 8.896,83.601 ccw(c10.8,83.6) 10.8,81.696 40.53,81.696 ccw(c40.53,83.6) 42.434,83.6 cw(c43.33,83.6) 43.33,84.496 49.73,84.496 cw(c49.73,83.6) 50.626,83.601 ccw(c52.53,83.6) 52.53,81.696 74.2,81.696 ccw(c74.2,83.6) 76.104,83.6 cw(c77,83.6) 77,84.496 83.8,84.496 cw(c83.8,83.8) 84.496,83.8 pad.1@84.496,78.01 ; pad.1@82.496,75.99 82.496,42 ccw(c84,42) 84,40.496 cw(c84,40) 84.496,40 pad.1@84.496,1.202 ; pad.1@82.496,76.004 cw(c84,76) 83.997,77.504 ; 83.801,0.504 ccw(c83.8,1.2) pad.1@84.496,1.199 ; 84.001,77.504 ccw(c84,78) pad.1@84.496,77.997
  Mid-Layer 2 w1: 0.504,1.199 ccw(c1.2,1.2) 1.199,0.504 ; 0.504,1.201 0.504,39.243 ; 0.504,39.244 cw(c1,39.243) 1,39.739 ccw(c1,41.243) 2.504,41.243 2.504,76.613 ccw(c1,76.613) 1,78.117 cw(c1,78.613) 0.504,78.613 0.504,83.8 cw(c1.2,83.8) pad.1@1.199,84.496 ; pad.1@1.2,84.496 pad.1@7.998,84.496 ; 1.202,0.504 83.799,0.504 ; pad.1@8.001,84.496 cw(c8,83.6) 8.896,83.601 ccw(c10.8,83.6) 10.8,81.696 40.53,81.696 ccw(c40.53,83.6) 42.434,83.6 cw(c43.33,83.6) 43.33,84.496 49.73,84.496 cw(c49.73,83.6) 50.626,83.601 ccw(c52.53,83.6) 52.53,81.696 74.2,81.696 ccw(c74.2,83.6) 76.104,83.6 cw(c77,83.6) 77,84.496 83.8,84.496 cw(c83.8,83.8) 84.496,83.8 pad.1@84.496,78.01 ; pad.1@82.496,75.99 82.496,42 ccw(c84,42) 84,40.496 cw(c84,40) 84.496,40 pad.1@84.496,1.202 ; pad.1@82.496,76.004 cw(c84,76) 83.997,77.504 ; 83.801,0.504 ccw(c83.8,1.2) pad.1@84.496,1.199 ; 84.001,77.504 ccw(c84,78) pad.1@84.496,77.997
  Bottom Layer w1: 0.504,1.199 ccw(c1.2,1.2) 1.199,0.504 ; 0.504,1.201 0.504,39.243 ; 0.504,39.244 cw(c1,39.243) 1,39.739 ccw(c1,41.243) 2.504,41.243 2.504,76.613 ccw(c1,76.613) 1,78.117 cw(c1,78.613) 0.504,78.613 0.504,83.8 cw(c1.2,83.8) pad.1@1.199,84.496 ; pad.1@1.2,84.496 pad.1@7.998,84.496 ; 1.202,0.504 83.799,0.504 ; pad.1@8.001,84.496 cw(c8,83.6) 8.896,83.601 ccw(c10.8,83.6) 10.8,81.696 40.53,81.696 ccw(c40.53,83.6) 42.434,83.6 cw(c43.33,83.6) 43.33,84.496 49.73,84.496 cw(c49.73,83.6) 50.626,83.601 ccw(c52.53,83.6) 52.53,81.696 74.2,81.696 ccw(c74.2,83.6) 76.104,83.6 cw(c77,83.6) 77,84.496 83.8,84.496 cw(c83.8,83.8) 84.496,83.8 pad.1@84.496,78.01 ; pad.1@82.496,75.99 82.496,42 ccw(c84,42) 84,40.496 cw(c84,40) 84.496,40 pad.1@84.496,1.202 ; pad.1@82.496,76.004 cw(c84,76) 83.997,77.504 ; 83.801,0.504 ccw(c83.8,1.2) pad.1@84.496,1.199 ; 84.001,77.504 ccw(c84,78) pad.1@84.496,77.997
SW_EXT_CS: D51.1 D56.1 J1.8 J2.11 | length 58
  Bottom Layer w0.3: D56.1@67.244,22.753 67.277,22.72 67.277,22.004 69.004,20.277 72.687,20.277 74.993,20.277 J2.11@76.27,19 77.597,20.327 77.597,38.989 78.287,39.679 78.287,57.603 76.343,59.547 J1.8@76.343,62.848 ; D51.1@76.728,42.103 78.232,42.103
SW_INT_CS: D56.3 J2.12 U5.21 U6.21 U7.21 U8.21 U9.21 U10.21 | length 85.2
  Top Layer w0.4: v1(69.088,35.75) 69.088,18.923 70.278,17.733 74.997,17.733 J2.12@76.27,16.46
  Mid-Layer 2 w0.254: v1(69.088,35.75) 69.596,36.258 69.596,42.926 ; v1(69.088,42.95) 69.572,42.95 69.596,42.926 ; v1(69.088,50.15) 69.581,50.15 69.596,50.165 ; v1(69.088,57.35) 69.523,57.35 69.596,57.277 ; v1(69.088,64.55) 69.596,64.55 ; v1(69.088,71.75) 69.596,71.242 69.596,64.55 ; 69.596,42.926 69.596,50.165 ; 69.596,50.165 69.596,57.277 ; 69.596,57.277 69.596,64.55
  Bottom Layer w0.254: U9.21@67.815,35.75 v1(69.088,35.75) ; U8.21@67.815,42.95 v1(69.088,42.95) ; U6.21@67.815,50.15 v1(69.088,50.15) ; U10.21@67.815,57.35 v1(69.088,57.35) ; U7.21@67.815,64.55 v1(69.088,64.55) ; U5.21@67.815,71.75 v1(69.088,71.75)
  Bottom Layer w0.3: D56.3@65.344,22.753 65.344,21.905 65.659,21.59 66.802,21.59 70.648,17.744 74.986,17.744 J2.12@76.27,16.46
VREF_DAC: C9.2 L1.1 TP3.1 U2.11 U2.13 | length 15.3
  Bottom Layer w0.35: TP3.1@36.449,26.765 37.687,25.527 39.624,25.527 43.191,25.527 ; L1.1@41.567,23.787 L1.1@41.617,23.787 41.67,23.841 42.779,23.841 43.191,24.253 43.191,25.527 ; U2.11@44.927,25.527 43.191,25.527 ; U2.13@44.927,26.827 43.288,26.827 C9.2@43.191,26.924 43.191,25.527
pads on no net: J1.9 J1.10 LD1.3 LD1.4 LD2.3 LD2.4 LD3.3 LD3.4 LD4.3 LD4.4 LD5.3 LD5.4 LD6.3 LD6.4 LD7.3 LD7.4 LD8.3 LD8.4 LD9.3 LD9.4 LD10.3 LD10.4 LD11.3 LD11.4 LD12.3 LD12.4 LD13.3 LD13.4 LD14.3 LD14.4 LD15.3 LD15.4 LD16.3 LD16.4 LD17.3 LD17.4 LD18.3 LD18.4 LD19.3 LD19.4 LD20.3 LD20.4 LD21.3 LD21.4 LD22.3 LD22.4 LD23.3 LD23.4 LD24.3 LD24.4 LD25.3 LD25.4 LD26.3 LD26.4 LD27.3 LD27.4 LD28.3 LD28.4 LD29.3 LD29.4 LD30.3 LD30.4 LD31.3 LD31.4 LD32.3 LD32.4 LD33.3 LD33.4 LD34.3 LD34.4 LD35.3 LD35.4 LD36.3 LD36.4 U2.2 U2.6 U2.7 U3.8 U3.9 U5.14 U5.15 U5.16 U5.17 U6.14 U6.15 U6.16 U6.17 U7.14 U7.15 U7.16 U7.17 U8.14 U8.15 U8.16 U8.17 U9.14 U9.15 U9.16 U9.17 U10.14 U10.15 U10.16 U10.17 U11.2 U11.3 U11.5

## Polygon pours and split planes (outlines as drawn)
GND on Top Layer "GND_L01_P000" (solid, pour order 0): -0.5,1.197 -0.5,39.243 -0.5,39.245 cw(c1,39.243) 1,40.743 ccw(c1,41.243) 1.5,41.243 1.5,76.613 ccw(c1,76.613) 1,77.113 cw(c1,78.613) -0.5,78.613 -0.5,83.8 cw(c1.2,83.8) 1.198,85.5 1.2,85.5 7.998,85.5 8,85.5 cw(c8,83.6) 9.9,83.602 9.9,83.6 ccw(c10.8,83.6) 10.8,82.7 40.53,82.7 ccw(c40.53,83.6) 41.43,83.6 41.43,83.602 cw(c43.33,83.6) 43.33,85.5 49.73,85.5 cw(c49.73,83.6) 51.63,83.602 51.63,83.6 ccw(c52.53,83.6) 52.53,82.7 74.2,82.7 ccw(c74.2,83.6) 75.1,83.6 75.1,83.602 cw(c77,83.6) 77,85.5 83.8,85.5 cw(c83.8,83.8) 85.5,83.8 85.5,78.01 85.5,78 cw(c84,78) 84,76.5 83.999,76.5 ccw(c84,76) 83.5,76 83.5,75.99 83.5,42 ccw(c84,42) 84,41.5 cw(c84,40) 85.5,40 85.5,1.202 85.5,1.2 cw(c83.8,1.2) 83.803,-0.5 83.8,-0.5 1.202,-0.5 1.2,-0.5 cw(c1.2,1.2)
GND on Mid-Layer 1 "GND_L02_P001" (solid, pour order 1): -0.5,1.197 -0.5,39.243 -0.5,39.245 cw(c1,39.243) 1,40.743 ccw(c1,41.243) 1.5,41.243 1.5,76.613 ccw(c1,76.613) 1,77.113 cw(c1,78.613) -0.5,78.613 -0.5,83.8 cw(c1.2,83.8) 1.198,85.5 1.2,85.5 7.998,85.5 8,85.5 cw(c8,83.6) 9.9,83.602 9.9,83.6 ccw(c10.8,83.6) 10.8,82.7 40.53,82.7 ccw(c40.53,83.6) 41.43,83.6 41.43,83.602 cw(c43.33,83.6) 43.33,85.5 49.73,85.5 cw(c49.73,83.6) 51.63,83.602 51.63,83.6 ccw(c52.53,83.6) 52.53,82.7 74.2,82.7 ccw(c74.2,83.6) 75.1,83.6 75.1,83.602 cw(c77,83.6) 77,85.5 83.8,85.5 cw(c83.8,83.8) 85.5,83.8 85.5,78.01 85.5,78 cw(c84,78) 84,76.5 83.999,76.5 ccw(c84,76) 83.5,76 83.5,75.99 83.5,42 ccw(c84,42) 84,41.5 cw(c84,40) 85.5,40 85.5,1.202 85.5,1.2 cw(c83.8,1.2) 83.803,-0.5 83.8,-0.5 1.202,-0.5 1.2,-0.5 cw(c1.2,1.2)
GND on Mid-Layer 2 "GND_L03_P002" (solid, pour order 2): -0.5,1.197 -0.5,39.243 -0.5,39.245 cw(c1,39.243) 1,40.743 ccw(c1,41.243) 1.5,41.243 1.5,76.613 ccw(c1,76.613) 1,77.113 cw(c1,78.613) -0.5,78.613 -0.5,83.8 cw(c1.2,83.8) 1.198,85.5 1.2,85.5 7.998,85.5 8,85.5 cw(c8,83.6) 9.9,83.602 9.9,83.6 ccw(c10.8,83.6) 10.8,82.7 40.53,82.7 ccw(c40.53,83.6) 41.43,83.6 41.43,83.602 cw(c43.33,83.6) 43.33,85.5 49.73,85.5 cw(c49.73,83.6) 51.63,83.602 51.63,83.6 ccw(c52.53,83.6) 52.53,82.7 74.2,82.7 ccw(c74.2,83.6) 75.1,83.6 75.1,83.602 cw(c77,83.6) 77,85.5 83.8,85.5 cw(c83.8,83.8) 85.5,83.8 85.5,78.01 85.5,78 cw(c84,78) 84,76.5 83.999,76.5 ccw(c84,76) 83.5,76 83.5,75.99 83.5,42 ccw(c84,42) 84,41.5 cw(c84,40) 85.5,40 85.5,1.202 85.5,1.2 cw(c83.8,1.2) 83.803,-0.5 83.8,-0.5 1.202,-0.5 1.2,-0.5 cw(c1.2,1.2)
GND on Bottom Layer "GND_L04_P003" (solid, pour order 3): -0.5,1.197 -0.5,39.243 -0.5,39.245 cw(c1,39.243) 1,40.743 ccw(c1,41.243) 1.5,41.243 1.5,76.613 ccw(c1,76.613) 1,77.113 cw(c1,78.613) -0.5,78.613 -0.5,83.8 cw(c1.2,83.8) 1.198,85.5 1.2,85.5 7.998,85.5 8,85.5 cw(c8,83.6) 9.9,83.602 9.9,83.6 ccw(c10.8,83.6) 10.8,82.7 40.53,82.7 ccw(c40.53,83.6) 41.43,83.6 41.43,83.602 cw(c43.33,83.6) 43.33,85.5 49.73,85.5 cw(c49.73,83.6) 51.63,83.602 51.63,83.6 ccw(c52.53,83.6) 52.53,82.7 74.2,82.7 ccw(c74.2,83.6) 75.1,83.6 75.1,83.602 cw(c77,83.6) 77,85.5 83.8,85.5 cw(c83.8,83.8) 85.5,83.8 85.5,78.01 85.5,78 cw(c84,78) 84,76.5 83.999,76.5 ccw(c84,76) 83.5,76 83.5,75.99 83.5,42 ccw(c84,42) 84,41.5 cw(c84,40) 85.5,40 85.5,1.202 85.5,1.2 cw(c83.8,1.2) 83.803,-0.5 83.8,-0.5 1.202,-0.5 1.2,-0.5 cw(c1.2,1.2)

## Keep-outs
Keep-Out Layer:
  lines w0.446: -0.5,1.197 ccw(c1.2,1.2) 1.2,-0.5 ; -0.5,1.2 -0.5,39.243 ; -0.5,39.245 cw(c1,39.243) 1,40.743 ccw(c1,41.243) 1.5,41.243 1.5,76.613 ccw(c1,76.613) 1,77.113 cw(c1,78.613) -0.5,78.613 -0.5,83.8 cw(c1.2,83.8) 1.198,85.5 ; 1.2,85.5 7.998,85.5 ; 1.202,-0.5 83.8,-0.5 ; 8,85.5 cw(c8,83.6) 9.9,83.602 ; 9.9,83.6 ccw(c10.8,83.6) 10.8,82.7 40.53,82.7 ccw(c40.53,83.6) 41.43,83.6 ; 41.43,83.602 cw(c43.33,83.6) 43.33,85.5 ; 43.299,85.5 49.73,85.5 cw(c49.73,83.6) 51.63,83.602 ; 51.63,83.6 ccw(c52.53,83.6) 52.53,82.7 74.2,82.7 ccw(c74.2,83.6) 75.1,83.6 ; 75.1,83.602 cw(c77,83.6) 77,85.5 83.8,85.5 cw(c83.8,83.8) 85.5,83.8 85.5,78.01 ; 83.5,75.99 83.5,42 ccw(c84,42) 84,41.5 cw(c84,40) 85.5,40 85.5,1.202 ; 83.5,76 cw(c84,76) 83.999,76.5 ; 83.803,-0.5 ccw(c83.8,1.2) 85.5,1.2 ; 84,76.5 ccw(c84,78) 85.5,78

## Other copper
Top Layer:
  rectangle net SHIELD: 82.296,0.502 84.498,2.413
  rectangle net SHIELD: 82.33,82.042 84.498,84.498
  rectangle net SHIELD: 0.502,77.978 2.54,84.498
  rectangle net SHIELD: 0.381,0.635 2.667,2.667
  pour cut-out: 46.53,79.167 cw(c46.53,82.4) 43.297,82.4 cw(c46.53,82.4) 46.53,85.633 cw(c46.53,82.4) 49.763,82.4 cw(c46.53,82.4)
  pour cut-out: 42.5,-1.133 cw(c42.5,2.1) 39.267,2.1 cw(c42.5,2.1) 42.5,5.333 cw(c42.5,2.1) 45.733,2.1 cw(c42.5,2.1)
Mid-Layer 1:
  rectangle net SHIELD: 76.27,25.811 79.784,27.413
  rectangle net SHIELD: 0.762,77.661 2.643,84.201
  rectangle net SHIELD: 81.915,82.423 84.455,84.455
  rectangle net SHIELD: 81.636,0.508 84.328,3.6
  rectangle net SHIELD: 0.502,0.635 2.921,3.232
  pour cut-out: 46.53,79.167 cw(c46.53,82.4) 43.297,82.4 cw(c46.53,82.4) 46.53,85.633 cw(c46.53,82.4) 49.763,82.4 cw(c46.53,82.4)
  pour cut-out: 42.5,-1.133 cw(c42.5,2.1) 39.267,2.1 cw(c42.5,2.1) 42.5,5.333 cw(c42.5,2.1) 45.733,2.1 cw(c42.5,2.1)
Mid-Layer 2:
  rectangle net SHIELD: 76.27,25.811 79.784,27.413
  rectangle net +5: 57.201,1.905 76.046,3.556
  rectangle net SHIELD: 0.762,77.674 2.667,84.498
  rectangle net SHIELD: 81.915,82.423 84.5,84.582
  rectangle net SHIELD: 81.915,0.762 84.328,2.921
  rectangle net SHIELD: 0.502,0.502 3.236,3.232
  rectangle net +5: 74.422,2.54 75.946,3.302
  pour cut-out: 46.53,79.167 cw(c46.53,82.4) 43.297,82.4 cw(c46.53,82.4) 46.53,85.633 cw(c46.53,82.4) 49.763,82.4 cw(c46.53,82.4)
  pour cut-out: 42.5,-1.133 cw(c42.5,2.1) 39.267,2.1 cw(c42.5,2.1) 42.5,5.333 cw(c42.5,2.1) 45.733,2.1 cw(c42.5,2.1)
Bottom Layer:
  rectangle net SHIELD: 81.4,80.905 84.5,84.5
  rectangle net SHIELD: 0.762,77.724 2.625,84.455
  rectangle net SHIELD: 0.5,0.502 3.236,2.794
  rectangle net SHIELD: 82.296,0.762 84.328,3.429
  region net NetQ1_2: 33.528,3.778 32.258,3.778 32.258,3.397 33.528,3.397
  region net NetQ2_2: 33.528,28.797 32.258,28.797 32.258,28.416 33.528,28.416
  region net NetQ2_2: 33.528,30.194 32.258,30.194 32.258,29.813 33.528,29.813
  rectangle net +5: 74.493,1.905 75.884,3.418
  region net NetQ1_2: 33.528,2.381 32.258,2.381 32.258,2 33.528,2
  pour cut-out: 46.53,79.167 cw(c46.53,82.4) 43.297,82.4 cw(c46.53,82.4) 46.53,85.633 cw(c46.53,82.4) 49.763,82.4 cw(c46.53,82.4)
  pour cut-out: 42.5,-1.133 cw(c42.5,2.1) 39.267,2.1 cw(c42.5,2.1) 42.5,5.333 cw(c42.5,2.1) 45.733,2.1 cw(c42.5,2.1)
  region net +5: 45.674,11.134 45.674,6.523 47.752,4.445 47.752,1.905 62.103,1.905 62.103,5.207 58.928,5.207 58.166,4.445 49.784,4.445 47.625,6.604 47.625,11.134
  region net +3.3: 38.1,15.24 41.481,15.24 43.815,12.906 43.815,8.763 41.783,8.763 41.783,11.786 40.43,13.138 38.1,13.138
  region net 12V_EXP: 65.043,14.224 67.691,14.224 68.183,14.716 73.66,14.716 73.66,13.133 65.043,13.133
  region net NetC35_1: 64.262,4.239 64.262,1.954 70.922,1.954 70.922,3.71 70.393,4.239

## Silkscreen, mask and mechanical layers (free items; w line width, h text height)
Top Overlay:
  drawing of 74 lines, arcs and shapes, not listed
  text "A" at 66.547,71.012 h1.52
  text "K" at 69.596,67.896 h1.52
  text "PROJECT BEE-PC1" at 32.469,10.834 h2
  text "NANORACK LASERDIODE V1.2.0" at 24.902,8.382 h2
Bottom Overlay:
  drawing of 76 lines, arcs and shapes, not listed

## Text inside footprints (layer, text, board x,y; h text height)
U5: Bottom 3D Body "*" at 67.004,70.067 h0.64 r180
U6: Bottom 3D Body "*" at 67.004,48.467 h0.64 r180
U7: Bottom 3D Body "*" at 67.004,62.867 h0.64 r180
U8: Bottom 3D Body "*" at 67.004,41.267 h0.64 r180
U9: Bottom 3D Body "*" at 67.004,34.067 h0.64 r180
U10: Bottom 3D Body "*" at 67.004,55.667 h0.64 r180